# EAGLE board JTAG-ICE-mkI (EAGLE 5.11)
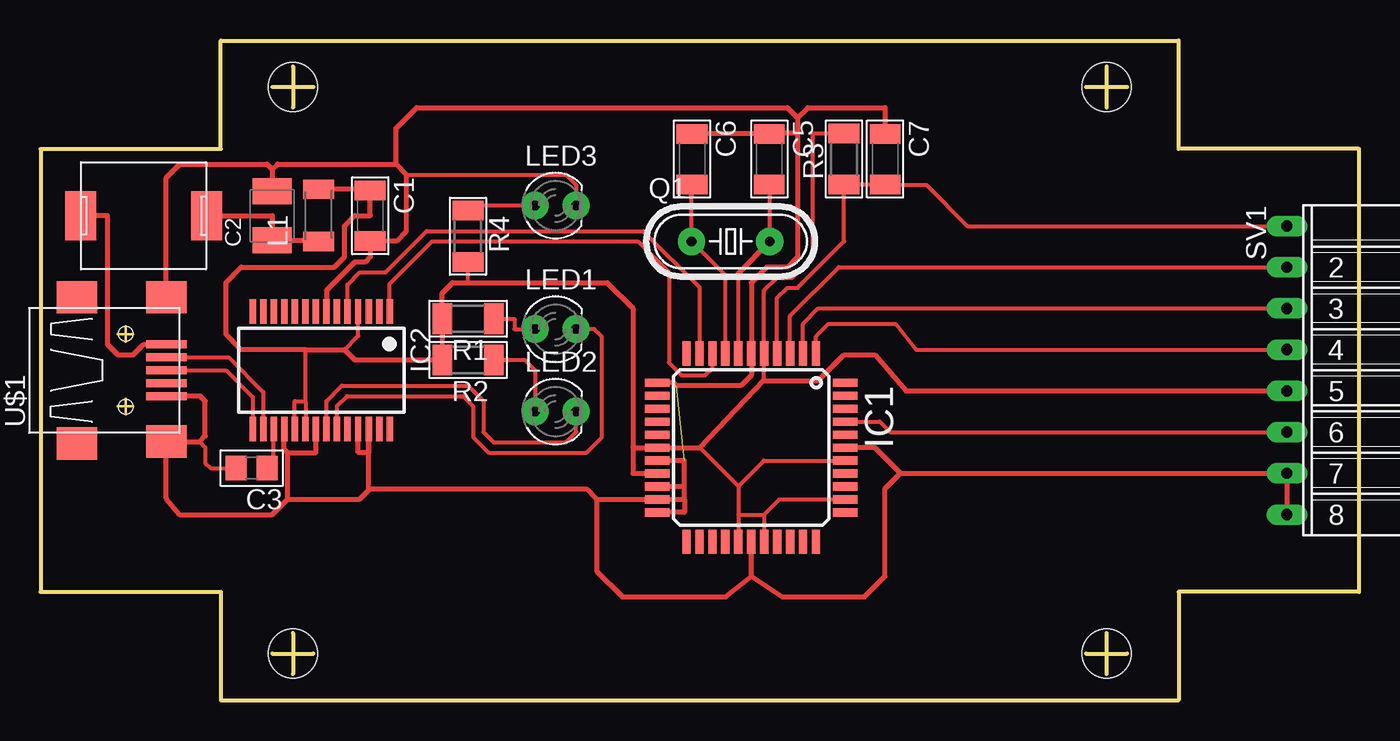
[diagram p0: board, top side]

Size 81.28 x 40.64 mm. Coordinates in mm from the lower left corner, seen from the top.
Outline: 15.56,39.05 15.56,36.51
Outline: 14.29,37.78 16.83,37.78
Outline: 64.45,37.78 66.99,37.78
Outline: 65.72,39.05 65.72,36.51
Outline: 64.45,2.86 66.99,2.86
Outline: 65.72,4.13 65.72,1.59
Outline: 14.29,2.86 16.83,2.86
Outline: 15.56,4.13 15.56,1.59
Outline: 11.11,0 70.17,0 70.17,6.67 81.28,6.67 81.28,33.97 70.17,33.97 70.17,40.64 11.11,40.64 11.11,33.97 0,33.97 0,6.67 11.11,6.67 11.11,0
Copper layers (1*16): Top 0.035mm / dielectric 1.5mm / Bottom 0.035mm
Design rules "voventus": minimum track width 0.3mm, minimum drill 0.6mm, track to track 8mil, track to pad 8mil, pad to pad 8mil, via to via 8mil, smd to smd 8mil, copper to edge 40mil, drill to drill 8mil, minimum pad ring 10mil, minimum via ring 8mil, stop-mask expansion 4mil, vias tented up to drill 0mil, thermal gap 10mil
Holes 3 mm at 15.56,37.78 15.56,2.86 65.72,37.78 65.72,2.86

## Footprints (pad centres in the part's own frame; a part is rotated, then mirrored left to right if it is on the bottom)
C1206 = smd 1.2 x 1.9: 1 -1.559,0; 2 1.559,0
SMC_B = smd 1.6 x 2.4: + -1.5,0; - 1.5,0
C0805 = smd 1.3 x 1.5: 1 -0.95,0; 2 0.95,0
3425L = smd 1.9 x 3: P$1 -3.882,0; P$2 3.882,0
TQFP44 = smd 1.5 x 0.5: 1 -5.8,4; 2 -5.8,3.2; 3 -5.8,2.4; 4 -5.8,1.6; 5 -5.8,0.8; 6 -5.8,0; 7 -5.8,-0.8; 8 -5.8,-1.6; 9 -5.8,-2.4; 10 -5.8,-3.2; 11 -5.8,-4; 23 5.8,-4; 24 5.8,-3.2; 25 5.8,-2.4; 26 5.8,-1.6; 27 5.8,-0.8; 28 5.8,0; 29 5.8,0.8; 30 5.8,1.6; 31 5.8,2.4; 32 5.8,3.2; 33 5.8,4 | smd 0.5 x 1.5: 12 -4,-5.8; 13 -3.2,-5.8; 14 -2.4,-5.8; 15 -1.6,-5.8; 16 -0.8,-5.8; 17 0,-5.8; 18 0.8,-5.8; 19 1.6,-5.8; 20 2.4,-5.8; 21 3.2,-5.8; 22 4,-5.8; 34 4,5.8; 35 3.2,5.8; 36 2.4,5.8; 37 1.6,5.8; 38 0.8,5.8; 39 0,5.8; 40 -0.8,5.8; 41 -1.6,5.8; 42 -2.4,5.8; 43 -3.2,5.8; 44 -4,5.8
SSOP28 = smd 0.4 x 1.5: 1 -4.225,-3.625; 2 -3.575,-3.625; 3 -2.925,-3.625; 4 -2.275,-3.625; 5 -1.625,-3.625; 6 -0.975,-3.625; 7 -0.325,-3.625; 8 0.325,-3.625; 9 0.975,-3.625; 10 1.625,-3.625; 11 2.275,-3.625; 12 2.925,-3.625; 13 3.575,-3.625; 14 4.225,-3.625; 15 4.225,3.625; 16 3.575,3.625; 17 2.925,3.625; 18 2.275,3.625; 19 1.625,3.625; 20 0.975,3.625; 21 0.325,3.625; 22 -0.325,3.625; 23 -0.975,3.625; 24 -1.625,3.625; 25 -2.275,3.625; 26 -2.925,3.625; 27 -3.575,3.625; 28 -4.225,3.625
L1206 = smd 1.2 x 1.9: 1 -1.587,0; 2 1.632,0
LED3MM = drill 0.6 pad 1.676 round: A -1.27,0; K 1.27,0
HC49/S = drill 0.6 pad 1.676 round: 1 -2.413,0; 2 2.413,0
R1206 = smd 1.2 x 1.9: 1 -1.581,0; 2 1.581,0
FE08W = drill 0.7 pad 1.27 long: 1 -8.89,0; 2 -6.35,0; 3 -3.81,0; 4 -1.27,0; 5 1.27,0; 6 3.81,0; 7 6.35,0; 8 8.89,0
USB-M-S1 = smd 2.5 x 0.5: D+ 2.671,0; D- 2.671,0.8; GND 2.671,-1.6; ID 2.671,-0.8; VBUS 2.671,1.6 | smd 2.5 x 2: GND@1 -2.829,-4.5; GND@2 -2.829,4.5; GND@3 2.671,-4.4; GND@4 2.671,4.5 | hole 0.9: 0.171,2.25; 0.171,-2.25

## Placement (x,y rotation side)
C1  100n  [C1206]  20.32,29.84 270 top
C2  4.7uF  [SMC_B]  14.29,29.84 90 top
C3  100n  [C0805]  13.02,14.29 180 top
C5  18p  [C1206]  44.93,33.34 270 top
C6  18p  [C1206]  40.16,33.34 270 top
C7  470n  [C1206]  52.07,33.34 270 top
F1  MF-SM030  [3425L]  6.35,29.84 0 top
IC1  MEGA16-A  [TQFP44]  43.81,15.56 270 top
IC2  FT232RL  [SSOP28]  17.3,20.32 180 top
L1  20uH  [L1206]  17.14,29.84 90 top
LED1  RxD  [LED3MM]  31.75,22.86 0 top
LED2  TxD  [LED3MM]  31.75,17.78 0 top
LED3  Power  [LED3MM]  31.75,30.48 0 top
Q1  7.3728MHz  [HC49/S]  42.55,28.26 0 top
R1  510  [R1206]  26.35,23.5 180 top
R2  510  [R1206]  26.35,20.95 180 top
R3  10k  [R1206]  49.53,33.34 90 top
R4  510  [R1206]  26.35,28.57 270 top
SV1  [FE08W]  76.83,20.32 270 top
U$1  USB-SHIELD  [USB-M-S1]  5.08,20.32 0 top

## Library data of the parts
C1 C3 C5-C7 R1-R4 = keyboard
C2 = rcl
F1 LED1-LED3 U$1 = JTAG-ICE-mkI
IC1 = atmel
IC2 = ftdichip
L1 = Analog
Q1 = JTAG-ICE-mkI; OC_FARNELL: 1667008; OC_NEWARK: unknown
SV1 = JTAG-ICE-mkI; OC_FARNELL: unknown; OC_NEWARK: unknown

## Nets
!RST: C7.2 IC1.4 R3.1 SV1.1
D+: IC2.15 U$1.D+
D-: IC2.16 U$1.D-
GND: C1.2 C2.- C3.2 C5.1 C6.1 C7.1 IC1.6 IC1.12 IC1.18 IC1.20 IC1.21 IC1.22 IC1.28 IC1.39 IC2.7 IC2.18 IC2.21 IC2.25 IC2.26 LED3.K SV1.7 SV1.8 U$1.GND U$1.GND@3 U$1.GND@4
N$1: F1.P$1 U$1.VBUS
N$2: C2.+ F1.P$2 L1.1
N$3: C3.1 IC2.17
N$4: LED2.A R2.1
N$5: IC2.23 LED1.K
N$6: IC2.22 LED2.K
N$7: LED1.A R1.1
N$8: C5.2 IC1.7 Q1.2
N$9: C6.2 IC1.8 Q1.1
N$10: LED3.A R4.1
RXD: IC1.9 IC2.1
TCK: IC1.3 SV1.2
TDI: IC1.1 SV1.4
TDO: IC1.2 SV1.3
TMS: IC1.41 SV1.6
TXD: IC1.10 IC2.5
VCC: C1.1 IC1.5 IC1.17 IC1.19 IC1.27 IC1.29 IC1.35 IC1.38 IC2.4 IC2.19 IC2.20 L1.2 R1.2 R2.2 R3.2 R4.2 SV1.5

## Tracks (layer width: path | path; a pad name or v marks a point on that pad's centre or on a via)
!RST
  Top 0.254: 49.53,31.78 C7.2 | IC1.4 45.41,24.78 46.04,25.4 46.67,25.4 49.53,28.26 R3.1 | SV1.1 57.15,29.21 54.61,31.75 52.1,31.75
  Top 0.305: R3.1 49.53,31.78 | C7.2 52.1,31.75
D+
  Top 0.254: IC2.15 13.08,18.67 11.43,20.32 U$1.D+
D-
  Top 0.254: IC2.16 13.73,18.97 11.59,21.11 11.58,21.12 U$1.D-
GND  (1 unrouted)
  Top 0.254: 9.8,15.92 10.16,15.56 10.16,14.61 10.48,14.29 C3.2 | LED3.K 33.02,31.75 32.38,32.38 22.54,32.38
  Top 0.305: U$1.GND@4 7.75,32.2 8.57,33.02 13.97,33.02 14.29,32.7 | 21.91,33.02 22.54,32.38 22.54,28.89 21.94,28.29 C1.2 20.32,27.3 20,26.99 19.37,26.99 17.63,25.25 IC2.7 | 14.29,32.7 C2.- | 14.29,32.7 14.61,33.02 21.91,33.02 | IC2.25 19.58,15.24 20.23,15.24 IC2.26 20.23,13.02 | 15.24,12.38 14.29,11.43 8.57,11.43 7.75,12.41 U$1.GND@3 9.8,15.92 10.16,16.28 10.16,18.41 9.86,18.72 U$1.GND | 15.24,12.38 15.24,15.24 | IC2.18 15.03,15.45 15.24,15.24 | 20.23,13.02 20.23,12.93 19.68,12.38 15.24,12.38 | IC1.12 39.02,19.56 39.21,19.37 43.18,19.37 43.81,20 IC1.6 43.81,25.72 44.77,26.67 46.04,26.67 46.67,27.3 46.67,34.92 | IC1.18 39.69,14.76 39.69,13.16 | 39.69,13.16 IC1.20 | 39.69,12.36 IC1.21 37.99,12.38 34.29,12.38 | 39.69,12.36 39.69,13.16 | IC1.22 39.69,11.56 39.69,12.36 | IC2.21 16.98,15.24 15.24,15.24 | 43.81,7.62 45.72,6.35 50.8,6.35 52.07,7.62 52.07,13.02 53.02,13.97 | 40.19,34.92 C6.1 C5.1 44.95,34.92 46.67,34.92 | C7.1 52.07,36.51 47.31,36.51 46.67,35.88 | 46.67,35.88 46.67,34.92 | 46.67,35.88 46.04,36.51 23.18,36.51 21.91,35.24 21.91,33.02 | 20.23,13.02 33.66,13.02 34.29,12.38 | 43.81,7.62 IC1.28 | 43.81,7.62 42.23,6.35 35.88,6.35 34.29,7.94 34.29,12.38 | SV1.8 SV1.7 53.02,13.97 | IC1.39 51.44,15.56 53.02,13.97
N$1
  Top 0.305: U$1.VBUS 6.36,21.92 5.71,21.27 4.76,21.27 4.13,21.91 4.13,29.84 F1.P$1
N$2
  Top 0.305: L1.1 17.06,28.34 C2.+ 14.29,29.84 F1.P$2
N$3
  Top 0.254: 14.38,14.29 IC2.17
  Top 0.305: C3.1 14.38,14.29
N$4
  Top 0.254: R2.1 29.84,20.95 30.48,20.32 LED2.A
N$5
  Top 0.254: IC2.23 18.28,18.12 18.89,18.73 26.04,18.73 26.67,18.1 26.67,16.19 27.62,15.24 33.66,15.24 34.61,16.19 34.61,22.38 34.13,22.86 LED1.K
N$6
  Top 0.254: IC2.22 17.63,18.42 18.57,19.37 26.35,19.37 27.3,18.41 27.3,16.51 27.94,15.88 32.38,15.88 33.02,16.51 LED2.K
N$7
  Top 0.254: LED1.A 29.21,22.86 29.21,23.5 R1.1
N$8
  Top 0.254: IC1.7 43.02,26.31 | Q1.2 44.96,31.78 C5.2
  Top 0.305: 43.02,26.31 Q1.2
N$9
  Top 0.254: 40.13,30.99 Q1.1 42.22,26.17 IC1.8
  Top 0.305: 40.13,30.99 C6.2
N$10
  Top 0.254: LED3.A 26.35,30.48 R4.1
RXD
  Top 0.254: IC2.1 21.53,25.66 24.13,28.26 36.83,28.26 38.73,26.35 38.73,20.8 39.53,20 40.96,20 41.41,20.46 IC1.9
TCK
  Top 0.254: IC1.3 46.22,23.67 49.21,26.67 SV1.2
TDI
  Top 0.254: IC1.1 47.81,22.41 48.58,23.18 52.7,23.18 53.98,21.59 SV1.4
TDO
  Top 0.254: IC1.2 47.02,23.2 47.94,24.13 SV1.3
TMS
  Top 0.254: IC1.41 51.74,17.16 52.39,16.51 SV1.6
TXD
  Top 0.254: IC2.5 18.93,25.6 19.68,26.35 21.27,26.35 23.81,28.89 37.15,28.89 40.62,25.43 IC1.10
VCC
  Top 0.254: IC2.4 19.58,22.44 18.73,21.59 | 16.33,18.41 IC2.20 | 16.33,18.41 16.33,21.59 | IC2.19 15.68,18.41 16.33,18.41 | 44.62,19.69 IC1.5 44.62,25.25 45.4,26.04 46.35,26.04 47.62,27.3 47.62,34.92 R3.2 | 43.02,13.18 43.02,11.43 | 43.02,11.43 IC1.27 | 40.64,15.56 43.02,13.18 | 44.62,11.43 IC1.29 | 43.02,11.43 44.62,11.43 | IC1.35 45.54,12.36 44.62,11.43 | IC1.38 44.59,14.76 43.02,13.18 | 26.35,25.72 R4.2
  Top 0.305: L1.2 20.25,31.48 C1.1 20.32,29.84 19.37,29.84 18.73,29.21 18.73,27.3 18.1,26.67 12.38,26.67 11.43,25.72 11.43,22.54 12.38,21.59 16.33,21.59 18.73,21.59 19.37,20.95 R2.2 R1.2 24.77,25.08 25.4,25.72 26.35,25.72 34.92,25.72 36.51,24.13 36.51,15.56 | 36.51,15.56 IC1.17 40.64,15.56 44.62,19.69 44.62,19.68 47.94,19.68 49.53,21.27 51.44,21.27 53.34,19.05 SV1.5 | 36.51,15.56 36.51,13.97 38,13.97 IC1.19